# Altium PCB PCB.PcbDoc
Units mil, origin at the board's own origin, x right, y up, seen from the top; angles counter-clockwise.
Board outline 1500 x 550 mil, 4 copper layers (Top Layer, Mid Layer 1, Mid Layer 2, Bottom Layer), stack 61.811 mil thick; 17 components, 13 nets, 71 pads, 14 vias.
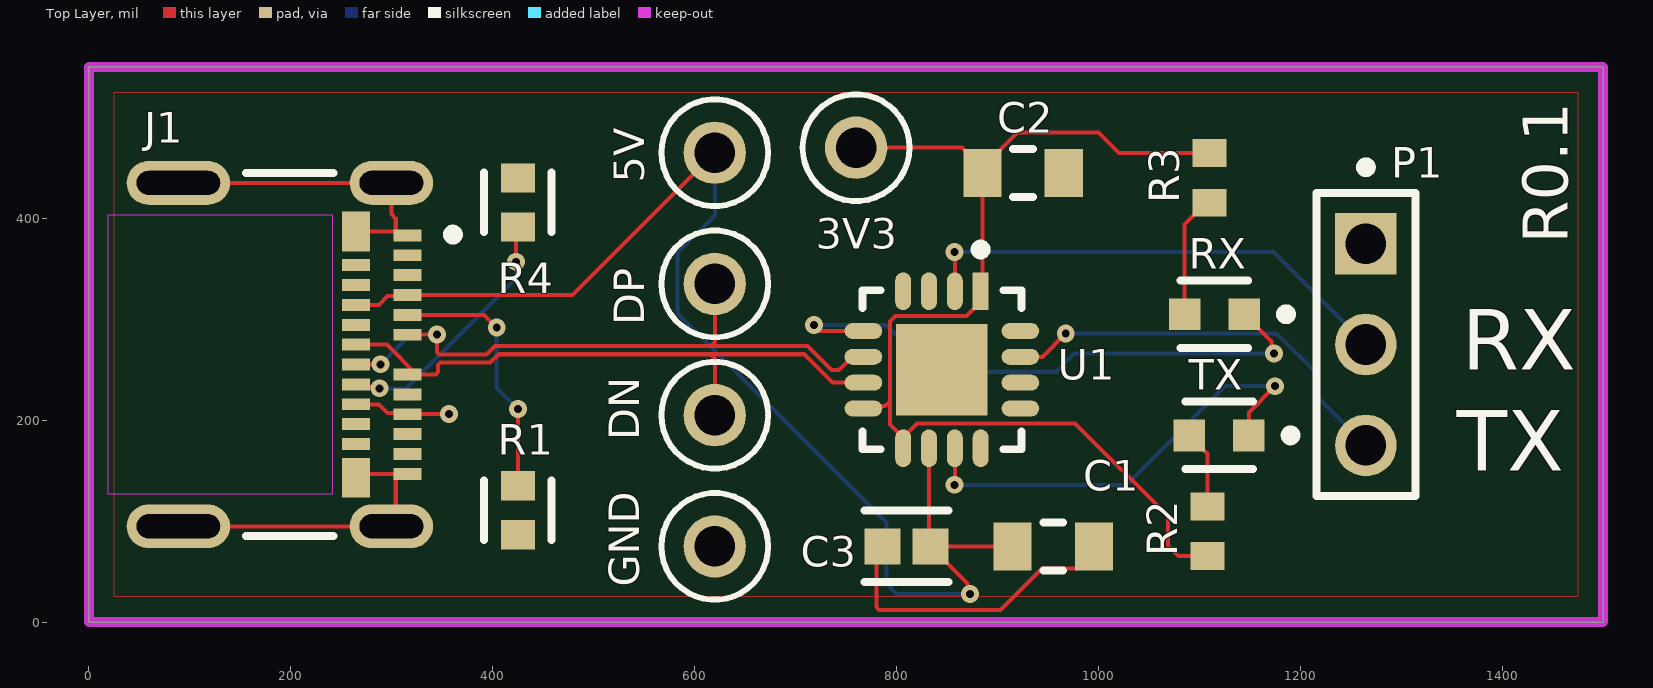
[diagram p0: Top Layer view]
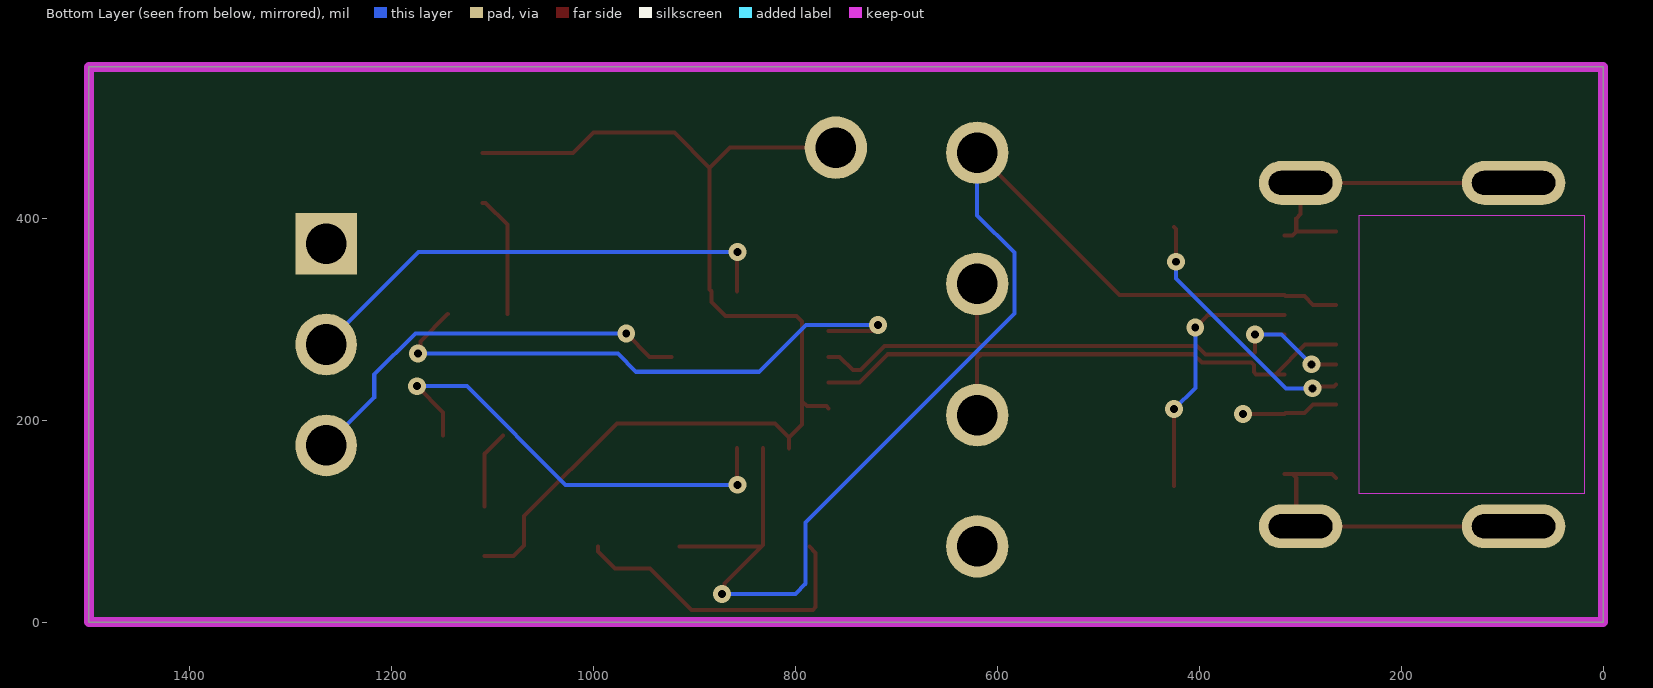
[diagram p1: Bottom Layer view, seen from below]
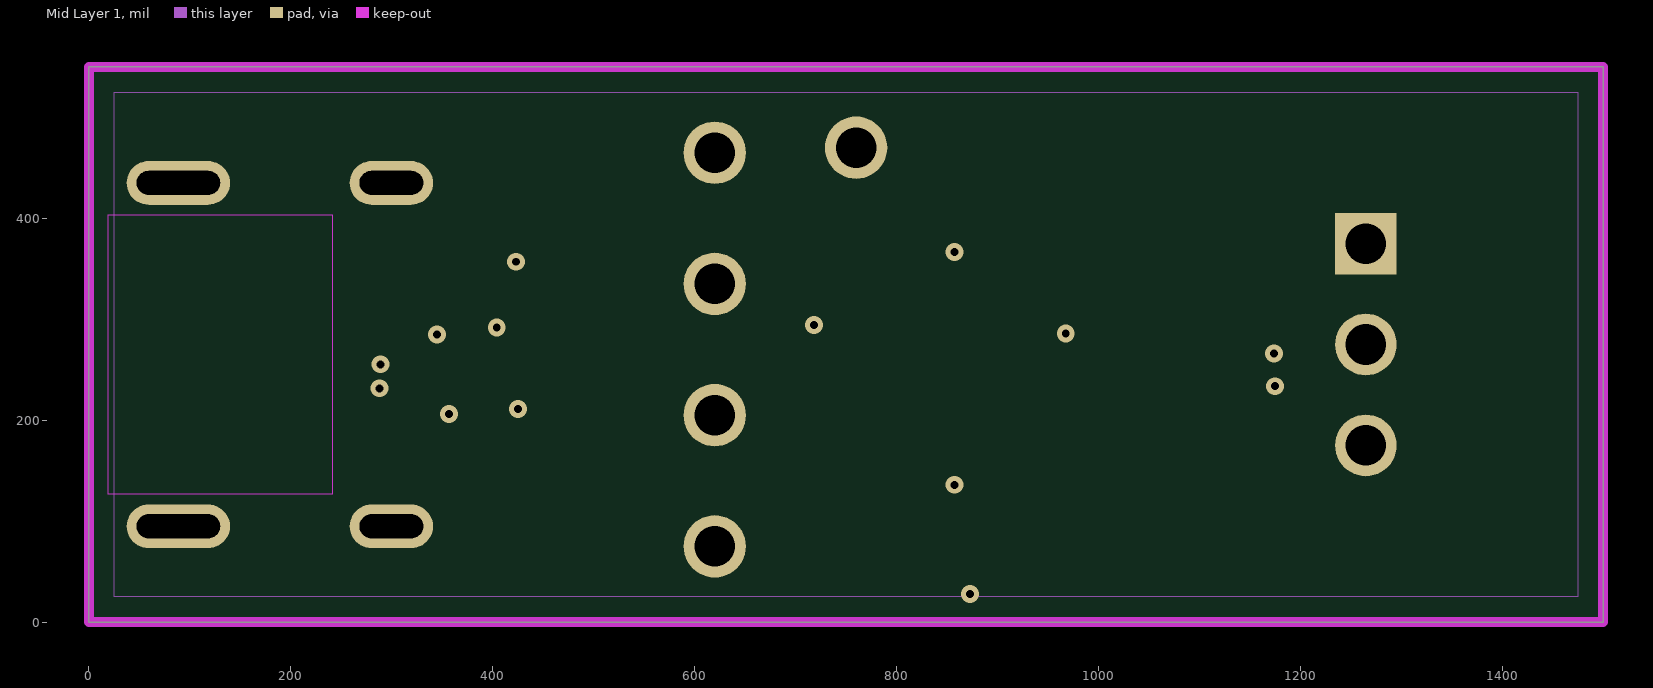
[diagram p2: Mid Layer 1]
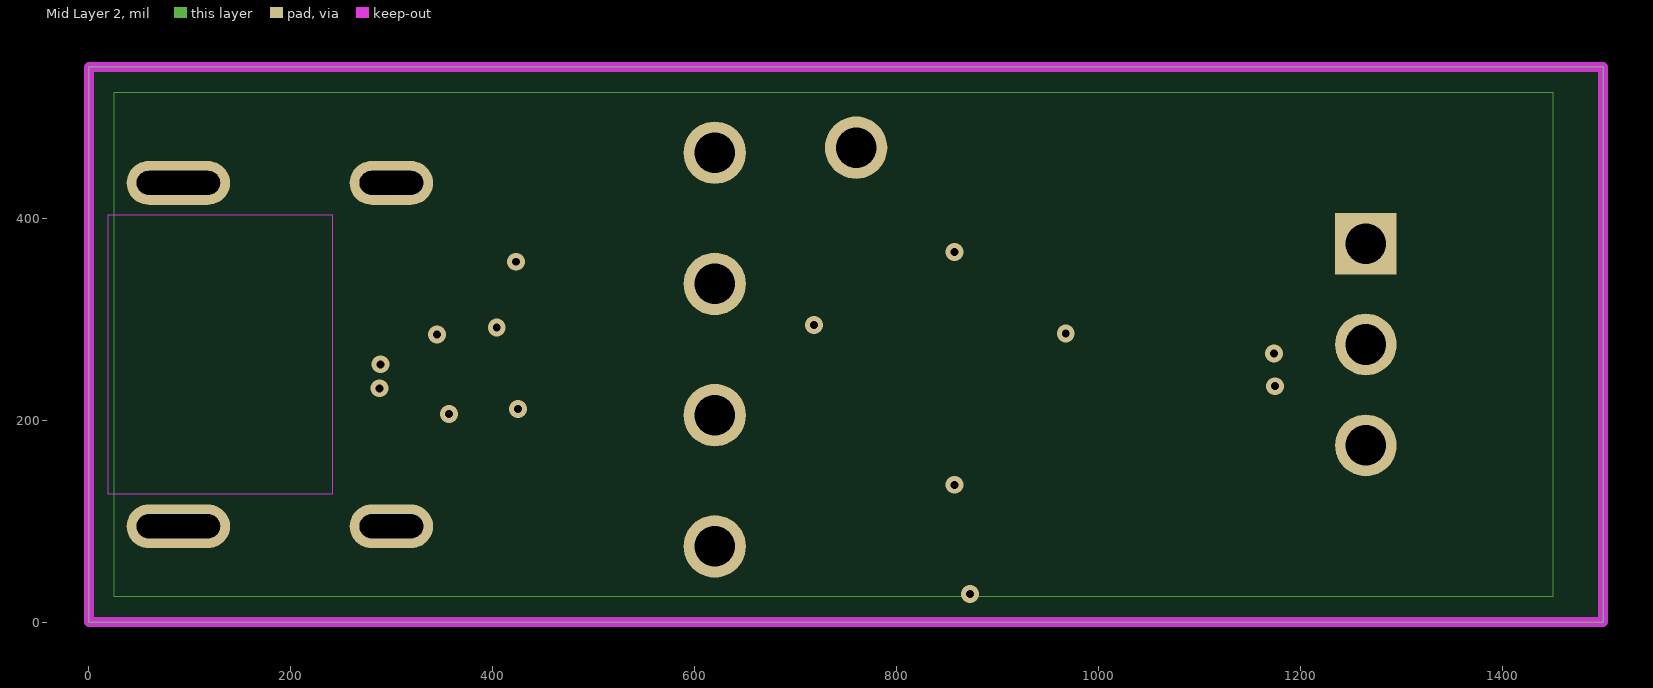
[diagram p3: Mid Layer 2]
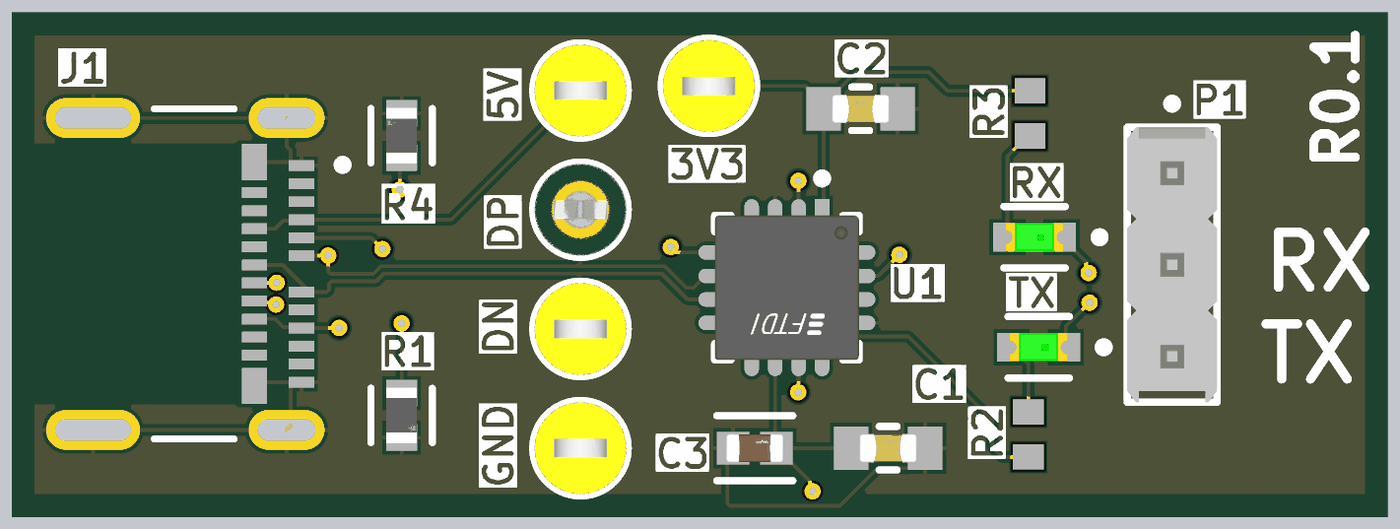
[diagram p4: 3D render of the assembled board from above, using the file's embedded part models]

## Layer stack, top to bottom
Top Solder: solder mask 0.5, Solder Resist, Dk 3.8
Top Layer: signal copper 1.378
Dielectric 1: prepreg 3.937, 2313, Dk 4.05
Mid Layer 1: signal copper 0.689
Core: core 49.8031, FR-4, Dk 4.5
Mid Layer 2: signal copper 0.689
Dielectric 2: prepreg 3.937, 2313, Dk 4.05
Bottom Layer: signal copper 1.378
Bottom Solder: solder mask 0.5, Solder Resist, Dk 3.8

## Board outline
0,0 0,550 1500,550 1500,0

## Design rules (kind name [scope] priority, off if disabled: settings)
BoardOutlineClearance [All] p1: gap=7.87 ignorepadtopadclearanceinfootprint=FALSE
Clearance [All] p1: gap=4 ignorepadtopadclearanceinfootprint=FALSE except(5: Arc-Via Track-Via SMDPad-Via THPad-Via Via-Via Via-Fill Via-Poly Via-Region Via-Text; 9.84: Arc-Hole Track-Hole SMDPad-Hole THPad-Hole Via-Hole Fill-Hole Poly-Hole Region-Hole Text-Hole)
ComponentClearance [All] p1: gap=4 collisioncheckmode=3 verticalgap=4 showdistances=TRUE
DiffPairsRouting [All] p1: maxlimit=4 minlimit=4 mostfreqgap=4 toplayer_minwidth=4 toplayer_maxwidth=71497.94 toplayer_prefwidth=4 midlayer1_minwidth=4 midlayer1_maxwidth=71497.94 midlayer1_prefwidth=4 midlayer2_minwidth=4 midlayer2_maxwidth=71497.94 midlayer2_prefwidth=4 bottomlayer_minwidth=4 bottomlayer_maxwidth=71497.94 bottomlayer_prefwidth=4 maxuncoupledlength=500
Height [All] p1: minheight=0 maxheight=71497.94 prefheight=500
HoleSize [All] p1: absolutevalues=TRUE maxlimit=248.03 minlimit=7.87 maxpercent=80.000 minpercent=20.000
HoleToHoleClearance [All] p1: gap=9.84 allowstackedmicrovias=FALSE
MinimumAnnularRing [All] p1: minimumring=3
MinimumSolderMaskSliver [All] p1: minsoldermaskwidth=0
PlaneClearance [All] p1: clearance=4
PlaneConnect PlaneConnectPowerPads [InPadClass('PowerPads')] p1: planeconnectstyle=Direct reliefexpansion=20 reliefentries=4 reliefconductorwidth=10 reliefairgap=10
PlaneConnect [All] p2: pad.planeconnectstyle=Relief pad.reliefexpansion=11.81 pad.reliefentries=4 pad.reliefconductorwidth=4 pad.reliefairgap=4 via.planeconnectstyle=Direct via.reliefexpansion=11.81 via.reliefentries=4 via.reliefconductorwidth=5 via.reliefairgap=5
PolygonConnect PolygonConnectPowerPads [All vs (InPadClass('PowerPads'))] p1: connectstyle=Direct reliefconductorwidth=10 reliefentries=4 polygonreliefangle="90 Angle" airgapwidth=10
PolygonConnect [All] p2: thpad.connectstyle=Relief thpad.reliefconductorwidth=4 thpad.reliefentries=4 thpad.polygonreliefangle="90 Angle" thpad.airgapwidth=4 smdpad.connectstyle=Relief smdpad.reliefconductorwidth=4 smdpad.reliefentries=4 smdpad.polygonreliefangle="90 Angle" smdpad.airgapwidth=4 via.connectstyle=Direct via.reliefconductorwidth=5 via.reliefentries=4 via.polygonreliefangle="90 Angle" via.airgapwidth=5
RoutingVias [All] p1: holewidth=7.87 width=17.72 viastyle="Through Hole" minholewidth=7.87 minwidth=17.72 maxholewidth=248.03 maxwidth=257.87
SilkToSilkClearance [All] p1: silktosilkclearance=0
SilkToSolderMaskClearance [IsPad] p1: minsilkscreentomaskgap=4 clearancetoexposedcopper=TRUE
SolderMaskExpansion [All] p1: expansion=2.95 istentingtop=FALSE
Width [All] p1: maxlimit=71497.94 minlimit=4 preferedwidth=4
20 further rules are at their usual default settings.

## Classes and differential pairs
component class Main: 3V3 5V C1 C2 C3 DN DP J1 P1 R1 R2 R3 R4 RX TX U1
differential pair D: +D_P -D_N

## Components (designator, comment, footprint, x,y, rotation, side; value= is the part's Value field where it differs from the comment)
3V3 "5004" FP-5004-MFG 760,470 r0 top (schematic designator J4)
5V "5004" FP-5004-MFG 620,465 r0 top (schematic designator J5)
C1 "100nF" FP-CGA3E-0_3-0_1-IPC_A 955.35,75 r0 top
C2 "100nF" FP-CGA3E-0_3-0_1-IPC_A 925.35,445 r0 top
C3 "4.7uF" FP-GRM188-0_2-IPC_C 810,75 r0 top
DN "5004" FP-5004-MFG 620,205 r0 top (schematic designator J6)
DP "5004" FP-5004-MFG 620,335 r0 top (schematic designator J3)
GND "5004" FP-5004-MFG 620,75 r0 top (schematic designator J7)
J1 "1054500101" FP-1054500101-MFG 167.32,265 r270 top locked
P1 "22-28-4033" MOLX-22-28-4033_V 1265,275 r270 top
R1 "5k1" FP-CRCW0603-e3-IPC_C 425,110.77 r270 top
R2 "270R" RESC1608X55X30LL15T15 1108.23,90 r270 top
R3 "270R" RESC1608X55X30LL15T15 1110,440 r90 top
R4 "5k1" FP-CRCW0603-e3-IPC_C 425,415.77 r90 top
RX "RX Led" FP-LTST-C190GKT-MFG 1115,305 r180 top (schematic designator D2)
TX "TX Led" FP-LTST-C190GKT-MFG 1119.53,185 r180 top (schematic designator D1)
U1 "FT230XQ-R" FP-QFN-16-MFG 845,250 r270 top

## Footprints (in the part's own frame and the unit in brackets; to place one, negate y for a bottom-side part, rotate by r counter-clockwise, add the part's x,y. Pads: shape width x height; smd on the part's side, far side on the other; paste and mask are expansions set on the pad)
FP-5004-MFG [mm]
  round 1.57 hole 1.02 paste-1000 mask+0: 1(0,0)
  silkscreen extent -1.35,-1.34 1.35,1.34, body extent -1.45,-1.45 1.45,1.45, height 0.25
FP-1054500101-MFG [mm]
  rrect100% 1.1x2.1 hole 1.6 slot 0.6 at 0 deg paste-1000 mask+0: 1(-4.32,3.36) 2(4.32,3.36)
  rrect100% 1.1x2.6 hole 2.1 slot 0.6 at 0 deg paste-1000 mask+0: 3(-4.32,-2) 4(4.32,-2)
  rect 0.3x0.7 smd paste+0 mask+0: A1(-3,3.77) A2(-2.5,3.77) A3(-2,3.77) A4(-1.5,3.77) A5(-1,3.77) A6(-0.5,3.77) A7(0.5,3.77) A8(1,3.77) A9(1.5,3.77) A10(2,3.77) A11(2.5,3.77) A12(3,3.77) B2(2.25,2.47) B3(1.75,2.47) B4(1.25,2.47) B5(0.75,2.47) B6(0.25,2.47) B7(-0.25,2.47) B8(-0.75,2.47) B9(-1.25,2.47) B10(-1.75,2.47) B11(-2.25,2.47)
  rect 1x0.7 smd paste+0 mask+0: B1(3.1,2.47) B12(-3.1,2.47)
  Keep-Out Layer region: -3.5,-3.77 3.5,-3.77 3.5,1.88 -3.5,1.88
  silkscreen extent -4.57,-0.3 4.57,5.04
FP-CGA3E-0_3-0_1-IPC_A [mm]
  rect 0.956x1.206 smd paste+0 mask+0: 1(-1.025,0) 2(1.025,0)
  silkscreen extent -0.25,-0.6 0.25,0.6, body extent -2,-1.1 2,1.1, height 0.25
FP-CRCW0603-e3-IPC_C [mil]
  rect 28.94x33.94 smd paste+0 mask+0: 1(-24.23,0) 2(24.23,0)
  silkscreen extent -30,-33 30,33, body extent -43,-23 43,23, height 10
FP-GRM188-0_2-IPC_C [mil]
  rect 35.63x35.68 smd paste+0 mask+0: 1(-23.64,0) 2(23.64,0)
  silkscreen extent -41,-35 41,35, body extent -45,-24 45,24, height 10
FP-LTST-C190GKT-MFG [mm]
  rect 0.8x0.8 smd paste+0 mask+0: 1(-0.75,0) 2(0.75,0)
  silkscreen extent -1.92,-0.85 0.85,0.85, body extent -1.25,-0.55 1.25,0.55, height 0.25
FP-QFN-16-MFG [mm]
  rect 0.95x0.4 smd paste+0 mask+0: 1(-1.975,0.975)
  rrect100% 0.95x0.4 smd paste+0 mask+0: 2(-1.975,0.325) 3(-1.975,-0.325) 4(-1.975,-0.975) 9(1.975,-0.975) 10(1.975,-0.325) 11(1.975,0.325) 12(1.975,0.975)
  rrect100% 0.4x0.95 smd paste+0 mask+0: 5(-0.975,-1.975) 6(-0.325,-1.975) 7(0.325,-1.975) 8(0.975,-1.975) 13(0.975,1.975) 14(0.325,1.975) 15(-0.325,1.975) 16(-0.975,1.975)
  rect 2.3x2.3 smd paste+0 mask+0: 17(0,0)
  silkscreen extent -3.15,-2 2,2, body extent -2.55,-2.55 2.55,2.55, height 0.25
MOLX-22-28-4033_V [mm] "THD, 3-Leads, Body 7.62x2.49mm, Pitch 2.54mm"
  rect 1.55x1.55 hole 1.02: 1(-2.54,0)
  round 1.55 hole 1.02: 2(0,0) 3(2.54,0)
  silkscreen extent -4.58,-1.24 3.81,1.24, body extent -3.81,-1.24 3.81,1.24, height 8.38
RESC1608X55X30LL15T15 [mm] "Chip Resistor, 2-Leads, Body 1.60x0.80mm, IPC High Density"
  rect 0.7x0.85 smd: 1(-0.625,0) 2(0.625,0)
  body extent -0.87,-0.48 0.87,0.48, height 0.55

## Part data
3V3 5V DN DP GND: library part CMP-2000-05575-2, "PC TEST POINT MINIATURE YELLOW", Manufacturer=Keystone, Automotive=No, Category=Conn, ComponentLink2Description=Datasheet, ComponentLink2URL=https://www.keyelco.com/product-pdf.cfm?p=1313, Contact Material=Silver, Device Class L1=Connectors, Device Class L2=unset, Device Class L3=unset, Digikey Description="PC TEST POINT MINIATURE YELLOW", Height=4.72mm, Is Female=yes, Lead Free=Yes, Manufacturer Part Number=5004, Mouser Description="TEST POINT PC MINI .040\"D YELLOW", Number Of Contacts=1, Octopart=https://octopart.com/5004-keystone-28591, Package=5004, RoHS=TRUE
C1 C2: library part CMP-2000-07546-2, "Cap Ceramic 100nF 50V X7R 10% Pad SMD 0603 +125°C Automotive T/R", Case Code (Imperial)=0603, Case Code (Metric)=1608, Dielectric=X7R, Max Operating Temperature=125°C, Min Operating Temperature=-55°C, Package Quantity=1, Ratings=AEC-Q200, Tolerance=10%, Voltage=50V, Capacitance=100nF, Case/Package=0603, Composition=Ceramic, Depth=0.8mm, Height=0.8mm, Lead Free="Lead Free", Length=1.6mm, Mount="Surface Mount", Packaging="Tape and Reel", Radiation Hardening=No, REACH SVHC="No SVHC", Termination=SMD/SMT, Thickness=0.035inch, Voltage Rating=50V, Voltage Rating (DC)=50V, Weight=7.1E-05oz, Width=0.8mm
C3: library part CMP-2006-02545-2, "Chip Multilayer Ceramic Capacitors for General Purpose, 0603, 4.7uF, X5R, 15%, 10%, 35V", Case Code (Imperial)=0603, Case Code (Metric)=1608, Dielectric=X5R, Max Operating Temperature=85°C, Min Operating Temperature=-55°C, Package Quantity=4000, Resistor Type=Ceramic, Tolerance=10%, Voltage=35V, Capacitance=4.7uF, Case/Package=0603, Depth=0.8mm, Height=0.8mm, Lead Free="Lead Free", Length=1.6mm, Material=Ceramic, Mount="Surface Mount", Packaging="Tape and Reel", REACH SVHC="No SVHC", Termination=SMD/SMT, Thickness=0.031inch, Voltage Rating=35V, Voltage Rating (DC)=35V, Weight=0.000222oz, Width=0.8mm
J1: library part CMP-04767-000004-1, "CONN RCP USB3.1 TYPEC 24P SMD RA", Current Rating=0.25/1.25/5A, Manufacturer=Molex, Package=0, Temperature="-30°C to +85°C", Temperature Range High=+85°C, Temperature Range Low=-30°C, Voltage Rating=30V, Automotive=No, Category=Conn, ComponentLink2Description=Datasheet, ComponentLink2URL=https://www.molex.com/webdocs/datasheets/pdf/en-us/1054500101_IO_CONNECTORS.pdf, Conn Orientation="Right Angle", Contact Material=Gold,Nickel, Device Class L1=Connectors, Device Class L2="USB Connectors", Device Class L3=unset, Digikey Description="CONN RCP USB3.1 TYPEC 24P SMD RA", Footprint Url=https://www.molex.com/pdm_docs/sd/1054500101_sd.pdf, Height=3.44mm, Is Female=yes, Lead Free=Yes, Manufacturer Part Number=1054500101, Mouser Description="USB Shielded I/O Receptacle; Type C; Right Angle; Surface Mount; Gold over Nickel", Number Of Contacts=24, Octopart=https://octopart.com/105450-0101-molex-68082325, Pitch=0.5mm, RoHS=TRUE, Shielding=true, Usb Standard="USB 3.1"
P1: library part CMP-1676-00001-5, "Male Header, Pitch 2.54 mm, 1 x 3 Position, Height 8.38 mm, Tail Length 3.18 mm, RoHS, Bulk", Colour=Black, Current Rating="4 A", Manufacturer=Molex, Max Operating Temperature="75 degC", Min Operating Temperature="0 degC", Package Quantity=1, Voltage Rating="250 V", ComponentLink1Description="Manufacturer URL", ComponentLink1URL=http://www.molex.com/, ComponentLink2Description=Datasheet, ComponentLink2URL=http://www.molex.com/pdm_docs/sd/022284033_sd.pdf, Contact Finish=Gold, Contact Material=Brass, Contact Plating=Gold, DatasheetVersion="Rev. G, 01/2012", Height="8.38 mm", Lead Pitch="0.1 inch", Length="7.62 mm", Mount="Through Hole", Mounting Technology="Through Hole", PackageDescription="Male Header, Pitch 2.54 mm, 1 x 3 Position, Height 8.38 mm, Tail Length 3.18 mm", PackageReference=22-28-4033, Packaging=Bulk, Pins=3, REACH SVHC=Unknown, RoHSCompliant=true, Rows=1
R1 R4: library part CMP-1012-00590-3, "RES Thick Film, 5.1kΩ, 1%, 0.1W, 100ppm/°C, 0603", Case Code (Imperial)=0603, Case Code (Metric)=1608, Max Operating Temperature=155°C, Min Operating Temperature=-55°C, Package Quantity=5000, Power Rating=100mW, Resistance=5.1kR, Temperature Coefficient=100ppm/°C, Tolerance=1%, Voltage Rating=75V, Case/Package=0603, Composition="Thick Film", Contact Plating=Tin, Depth=0.85mm, Height=0.45mm, Lead Free="Lead Free", Length=1.55mm, Military Standard=Not, Mount="Surface Mount", Packaging="Tape and Reel", Radiation Hardening=No, Termination=SMD/SMT, Voltage Rating (DC)=75V, Weight=7.1E-05oz, Width=0.85mm
R2 R3: library part CMP-2000-00388-1, Manufacturer=Panasonic, Part Number=ERJ3EKF2700V
RX TX: library part CMP-22017-000005-2, "LED GREEN CLEAR CHIP SMD", Case Code (Imperial)=0603, Case Code (Metric)=1608, Color=Green, Forward Current=30mA, Forward Voltage=2.1V, Lens Color=Colorless, Max Operating Temperature=85°C, Min Operating Temperature=-55°C, Package Quantity=1, Power Dissipation=100mW, Reverse Voltage=5V, Test Current=10mA, Voltage=2V, Case/Package=0603, Depth=0.8mm, Dominant Wavelength=569nm, Height=0.8mm, Illumination Color=Green, Lead Free="Lead Free", Length=1.6mm, Lens Style=Clear, Lens Transparency=Clear, Luminous Intensity=6mcd, Mount="Surface Mount", Number of Elements=1, Number of LEDs=1, Number of Pins=2, Packaging="Tape and Reel", Power Rating=100mW, Radiation Hardening=No, Viewing Angle=130°, Wavelength=565nm, Width=0.8mm
U1: library part CMP-0248-00010-3, "IC USB SERIAL BASIC UART 16QFN", Case/Package=QFN, Max Operating Temperature=85°C, Max Supply Voltage=5.5V, Min Operating Temperature=-40°C, Min Supply Voltage=2.97V, Operating Supply Current=8mA, Operating Supply Voltage=5V, Package Quantity=5000, Data Rate=12Mbps, Height=0.75mm, Interface=USB, Lead Free="Lead Free", Length=4mm, Mount="Surface Mount", Number of Channels=1, Number of Pins=16, Packaging="Tape and Reel", Weight=0.002014oz, Width=4mm

## Via types
v1: diameter 17.72, hole 7.87, Top Layer to Bottom Layer, 14 vias

## Nets (pads, with @x,y where several pads share a name; then routed paths per layer and width w, separated by ;. In a path a pad name is that pad's centre, name@x,y a point inside that pad or via, vN(x,y) a via of type N, cw(c..) or ccw(c..) an arc to the next point about the centre after c; other vN are vias at no path point)
D_N: DN.1 J1.A7 J1.B7 U1.7 | length 609.9
  Top Layer w4: J1.B7 295.16,274.84 J1.A7@324.69,245.31 ; J1.A7 J1.A7@324.69,245.31 ; DN.1 620,261.34 616,265.34 ; U1.7 736.8,237.2 730,244 708.66,265.34 616,265.34 ; J1.A7@324.69,245.31 343.66,245.31 346,247.66 346,254.66 348.34,257 397.31,257 405.66,265.34 616,265.34
D_P: DP.1 J1.A6 J1.B6 U1.6 | length 645.1
  Top Layer w4: J1.B6 264.69,255.28 288.64,255.28 v1(288.75,255.39) ; J1.A6 315.91,284.84 344.84,284.84 v1(345,285) 345,267.34 347.34,265 394,265 402.34,273.34 616,273.34 ; DP.1 620,277.34 616,273.34 ; U1.6 756.42,262.8 743.28,249.66 735.66,249.66 711.97,273.34 616,273.34
  Bottom Layer w4: v1(288.75,255.39) 318.36,285 v1(345,285)
GND: C1.2 C2.2 C3.1 GND.1 J1.1 J1.2 J1.3 J1.4 J1.A1 J1.A12 J1.B1 J1.B12 P1.1 R1.2 R4.2 U1.3 U1.13 U1.17 | length 941.4
  Top Layer w4: J1.4 J1.2 303.97,99.28 303.97,142.98 J1.A12@307.87,146.89 ; J1.3 J1.1 299.61,404.15 303.97,399.79 303.97,387.02 307.87,383.11 J1.A1 ; J1.B1 268.5,146.89 J1.A12@307.87,146.89 ; J1.B12 J1.A1@303.94,387.05 ; J1.A12 J1.A12@307.87,146.89 ; C3.1 780,68.64 780,15 782.86,12.14 903.19,12.14 944.31,53.26 978.89,53.26 995.71,70.08 C1.2
NetD1_2: R2.1 TX.2 | length 77.9
  Top Layer w4: TX.2 1108.23,166.77 R2.1
NetD2_2: R3.1 RX.2 | length 122.3
  Top Layer w4: RX.2 1085.47,393.82 1107.05,415.39 R3.1
NetJ1_A5: J1.A5 R1.1 | length 259.1
  Top Layer w4: J1.A5 391.63,304.37 v1(404,292) ; R1.1 v1(425,211)
  Bottom Layer w4: v1(404,292) 404,232 v1(425,211)
NetJ1_B5: J1.B5 R4.1 | length 257
  Top Layer w4: J1.B5 266.49,233.55 286.09,233.55 v1(288.01,231.62) ; v1(423,357) 423,389.54 R4.1
  Bottom Layer w4: v1(288.01,231.62) 314.05,231.62 423,340.57 v1(423,357)
RX_LED: RX.1 U1.5 | length 584.6
  Top Layer w4: v1(718.44,294.28) 724.33,288.39 U1.5 ; RX.1 1171.38,278.15 1171.38,268.62 v1(1174,266)
  Bottom Layer w4: v1(718.44,294.28) 789.72,294.28 836,248 958,248 976,266 v1(1174,266)
RXD: P1.2 U1.2 | length 484.1
  Top Layer w4: v1(857.61,366.5) 857.8,366.32 U1.2
  Bottom Layer w4: v1(857.61,366.5) 1173.5,366.5 P1.2
TX_LED: TX.1 U1.11 | length 453.9
  Top Layer w4: v1(857.35,136.02) 857.8,136.47 U1.11 ; TX.1 1149.06,207.74 v1(1174.99,233.67)
  Bottom Layer w4: v1(857.35,136.02) 1028.02,136.02 1125.67,233.67 v1(1174.99,233.67)
TXD: P1.3 U1.15 | length 410.9
  Top Layer w4: U1.15 944.51,262.8 v1(967.67,285.95)
  Bottom Layer w4: v1(967.67,285.95) 1176.48,285.95 1217.33,245.1 1217.33,222.67 P1.3
V3V3: 3V3.1 C2.1 R2.2 R3.2 U1.1 U1.8 U1.9 | length 1151.7
  Top Layer w4: 3V3.1 864.92,470 C2.1@885,449.92 ; U1.8 769.49,213.86 788.86,213.86 793.72,218.72 ; U1.9 U1.9@806.61,183.07 ; R2.2 1079.61,65.39 1069,76 1069,105 977.06,196.94 820.49,196.94 U1.9@806.61,183.07 ; R3.2 1020.33,464.61 999.94,485 920.08,485 C2.1@885,449.92 ; 793.72,218.72 793.72,195.96 U1.9@806.61,183.07 ; 793.72,218.72 793.72,297.76 799.02,303.06 869.51,303.06 883.39,316.93 U1.1 885,329.37 C2.1 C2.1@885,449.92
VUSB: 5V.1 C1.1 C3.2 J1.A4 J1.A9 J1.B4 J1.B9 U1.10 | length 1371.9
  Top Layer w4: J1.B4 287.19,215.79 295.97,207.01 314.68,207.01 J1.A9 356.64,205.94 v1(356.78,206.08) ; J1.B9 287.19,314.21 295.97,322.99 314.68,322.99 J1.A4 479.06,324.06 5V.1 ; U1.10 832.2,76.44 C3.2 ; v1(873,28) 870.38,30.62 870.38,38.25 C3.2 ; C1.1 C3.2
  Bottom Layer w4: 5V.1 620,402.99 583.09,366.08 583.09,305.49 790,98.59 790,38 800,28 v1(873,28)
pads on no net: J1.A2 J1.A3 J1.A8 J1.A10 J1.A11 J1.B2 J1.B3 J1.B8 J1.B10 J1.B11 U1.4 U1.12 U1.14 U1.16

## Polygon pours and split planes (outlines as drawn)
GND on Top Layer "NONET_L01_P000" (solid, shelved, pour order 0): 25,525 1475,525 1475,25 25,25
VUSB on Mid Layer 2 "NONET_L03_P001" (solid, shelved, pour order 1): 25,525 1450,525 1450,25 25,25
GND on Mid Layer 1 "NONET_L02_P002" (solid, shelved, pour order 2): 25,525 1475,525 1475,25 25,25

## Keep-outs
Keep-Out Layer:
  the board outline again, w10

## Silkscreen, mask and mechanical layers (free items; w line width, h text height)
Top Overlay:
  text "R0.1" at 1465,375 h45 r90
  text "RX" at 1360,250 h60
  text "TX" at 1355,150 h60